# EAGLE board Group project (EAGLE 9.7.0)

Size 345.9 x 242.46 mm. Coordinates in mm from the lower left corner, seen from the top.
Outline: 0,0 345.9,0 345.9,242.46 0,242.46 0,0
Copper layers (1*16): Top 0.035mm / dielectric 1.5mm / Bottom 0.035mm
Design rules "default": minimum track width 6mil, minimum drill 0.35mm, track to track 6mil, track to pad 6mil, pad to pad 6mil, via to via 6mil, smd to smd 6mil, copper to edge 40mil, drill to drill 6mil, minimum pad ring 10mil, minimum via ring 8mil, stop-mask expansion 4mil, vias tented up to drill 0mil, thermal gap 10mil

## Footprints (pad centres in the part's own frame; a part is rotated, then mirrored left to right if it is on the bottom)
LEDRD254W60D565H860B_G = drill 0.981 pad 1.581: 1 -1.27,0; 2 1.27,0
LEDRD254W60D565H860B_O = drill 0.981 pad 1.581: 1 -1.27,0; 2 1.27,0
LEDRD254W60D565H860B = drill 0.981 pad 1.581: 1 -1.27,0; 2 1.27,0
LEDRD254W60D565H860B_B = drill 0.981 pad 1.581: 1 -1.27,0; 2 1.27,0
HC-SR04 = drill 1.016 long: 1 -3.81,0; 2 -1.27,0; 3 1.27,0; 4 3.81,0
PIEZO = drill 1 pad 1.6: 1 -3.5,0; 2 3.5,0
RESAD1016W63L850D250B = drill 0.83 pad 1.43: 1 -5.08,0; 2 5.08,0
HA-06-SM065 = drill 1 pad 1.676: 1 -2.54,-2.54; 2 0,2.54; 3 2.54,-2.54
ARDUINO-UNO-R3-SHIELD = drill 1.016 pad 1.88: 3.3V 24.13,-2.54; 5V 24.13,0; A0 24.13,12.7; A1 24.13,15.24; A2 24.13,17.78; A3 24.13,20.32; A4 24.13,22.86; A5 24.13,25.4; AREF -24.13,-13.97; D2 -24.13,20.32; D3 -24.13,17.78; D4 -24.13,15.24; D5 -24.13,12.7; D6 -24.13,10.16; D7 -24.13,7.62; D8 -24.13,3.81; D9 -24.13,1.27; D10 -24.13,-1.27; D11 -24.13,-3.81; D12 -24.13,-6.35; D13 -24.13,-8.89; GND@0 24.13,2.54; GND@1 24.13,5.08; GND@2 -24.13,-11.43; IOREF 24.13,-7.62; NC 24.13,-10.16; RES 24.13,-5.08; RX -24.13,25.4; SCL -24.13,-19.05; SDA -24.13,-16.51; TX -24.13,22.86; VIN 24.13,7.62
JHD-162A = drill 1.016 long: 1 -19.05,0; 2 -16.51,0; 3 -13.97,0; 4 -11.43,0; 5 -8.89,0; 6 -6.35,0; 7 -3.81,0; 8 -1.27,0; 9 1.27,0; 10 3.81,0; 11 6.35,0; 12 8.89,0; 13 11.43,0; 14 13.97,0; 15 16.51,0; 16 19.05,0

## Placement (x,y rotation side)
D1  GREEN  [LEDRD254W60D565H860B_G]  155.8,234.55 180 top
D2  ORANGE  [LEDRD254W60D565H860B_O]  165.34,234.55 180 top
D3  RED  [LEDRD254W60D565H860B]  175.22,234.47 180 top
D4  RED  [LEDRD254W60D565H860B]  339.84,158.86 180 top
D5  BLUE  [LEDRD254W60D565H860B_B]  184.71,234.31 180 top
DIST1  DISTANCE-SENSOR-4PINHC-SR04  [HC-SR04]  240.41,156.17 0 top
PIEZO1  PIEZO  [PIEZO]  117.23,13.58 0 top
R1  1k  [RESAD1016W63L850D250B]  140.61,216.63 0 top
R2  1k  [RESAD1016W63L850D250B]  163.34,196.32 90 top
R3  1k  [RESAD1016W63L850D250B]  174.15,195.89 90 top
R4  1k  [RESAD1016W63L850D250B]  183.41,207.97 90 top
RPOT1  250k  [HA-06-SM065]  7.05,70.55 0 top
RPOT2  250k  [HA-06-SM065]  54.36,58.48 0 top
RPOT3  250k  [HA-06-SM065]  137.62,45.28 0 top
U1  ARDUINO-UNO-R3-SHIELD  [ARDUINO-UNO-R3-SHIELD]  107.9,147.78 270 top
U3  LCD-16X2JHD-162A  [JHD-162A]  189.67,49.07 0 top

## Library data of the parts
D1 = Tinkercad; CATEGORY: Opto-Electronic; SUB-CATEGORY: LED; VALUE: LED_GREEN
D2 = Tinkercad; CATEGORY: Opto-Electronic; SUB-CATEGORY: LED; VALUE: LED_ORANGE
D3 D4 = Tinkercad; CATEGORY: Opto-Electronic; SUB-CATEGORY: LED; VALUE: LED_RED
D5 = Tinkercad; CATEGORY: Opto-Electronic; SUB-CATEGORY: LED; VALUE: LED_BLUE
DIST1 PIEZO1 R1-R4 RPOT1-RPOT3 U1 U3 = Tinkercad

## Nets
D1_C: D1.2 R1.2
D2_C: D2.2 R2.2
D3_C: D3.2 R3.2
D5_C: D5.2 R4.2
U1_5V: D4.1 DIST1.1 RPOT1.1 RPOT2.1 RPOT3.1 U1.5V U3.2
U1_A0: RPOT1.2 U1.A0
U1_A1: RPOT2.2 U1.A1
U1_A3: PIEZO1.1 U1.A3
U1_D2: U1.D2 U3.14
U1_D3: U1.D3 U3.13
U1_D4: U1.D4 U3.12
U1_D5: DIST1.2 U1.D5 U3.11
U1_D6: DIST1.3 U1.D6 U3.6
U1_D7: U1.D7 U3.4
U1_D9: D1.1 U1.D9
U1_D10: D2.1 U1.D10
U1_D11: D3.1 U1.D11
U1_D12: D5.1 U1.D12
U1_GND: D4.2 DIST1.4 PIEZO1.2 R1.1 R2.1 R3.1 R4.1 RPOT1.3 RPOT2.3 RPOT3.3 U1.GND@0 U1.GND@1 U1.GND@2 U3.1
U3_VO: RPOT3.2 U3.3

## Tracks (layer width: path | path; a pad name or v marks a point on that pad's centre or on a via)
D1_C  (1 unrouted)
D2_C  (1 unrouted)
D3_C  (1 unrouted)
D5_C  (1 unrouted)
U1_5V  (6 unrouted)
U1_A0  (1 unrouted)
U1_A1  (1 unrouted)
U1_A3  (1 unrouted)
U1_D2  (1 unrouted)
U1_D3  (1 unrouted)
U1_D4  (1 unrouted)
U1_D5  (2 unrouted)
U1_D6  (2 unrouted)
U1_D7  (1 unrouted)
U1_D9  (1 unrouted)
U1_D10  (1 unrouted)
U1_D11  (1 unrouted)
U1_D12  (1 unrouted)
U1_GND  (13 unrouted)
U3_VO  (1 unrouted)